# Altium PCB TinyFoc_v1.PcbDoc
Units mm, origin at the board's own origin, x right, y up, seen from the top; angles counter-clockwise.
Board outline 53.47 x 34.1 mm, 2 copper layers (Top Layer, Bottom Layer); 51 components, 44 nets, 226 pads, 38 vias.
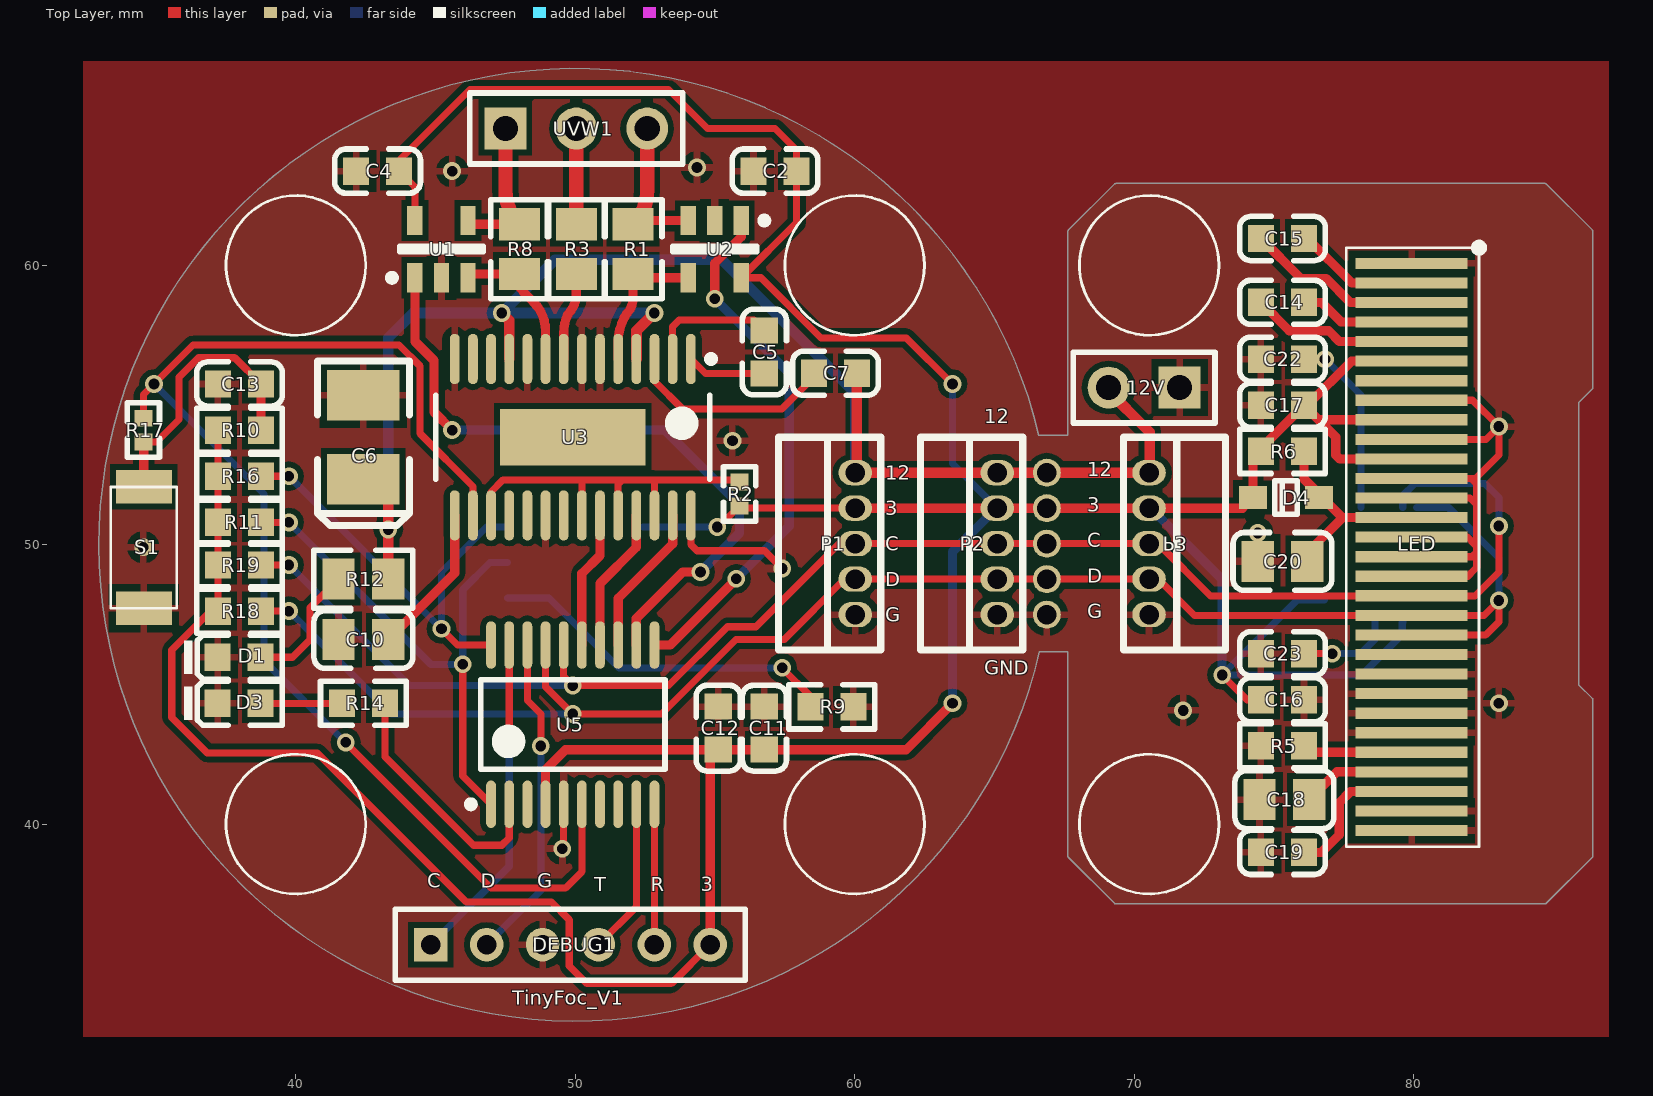
[diagram p0: Top Layer view]
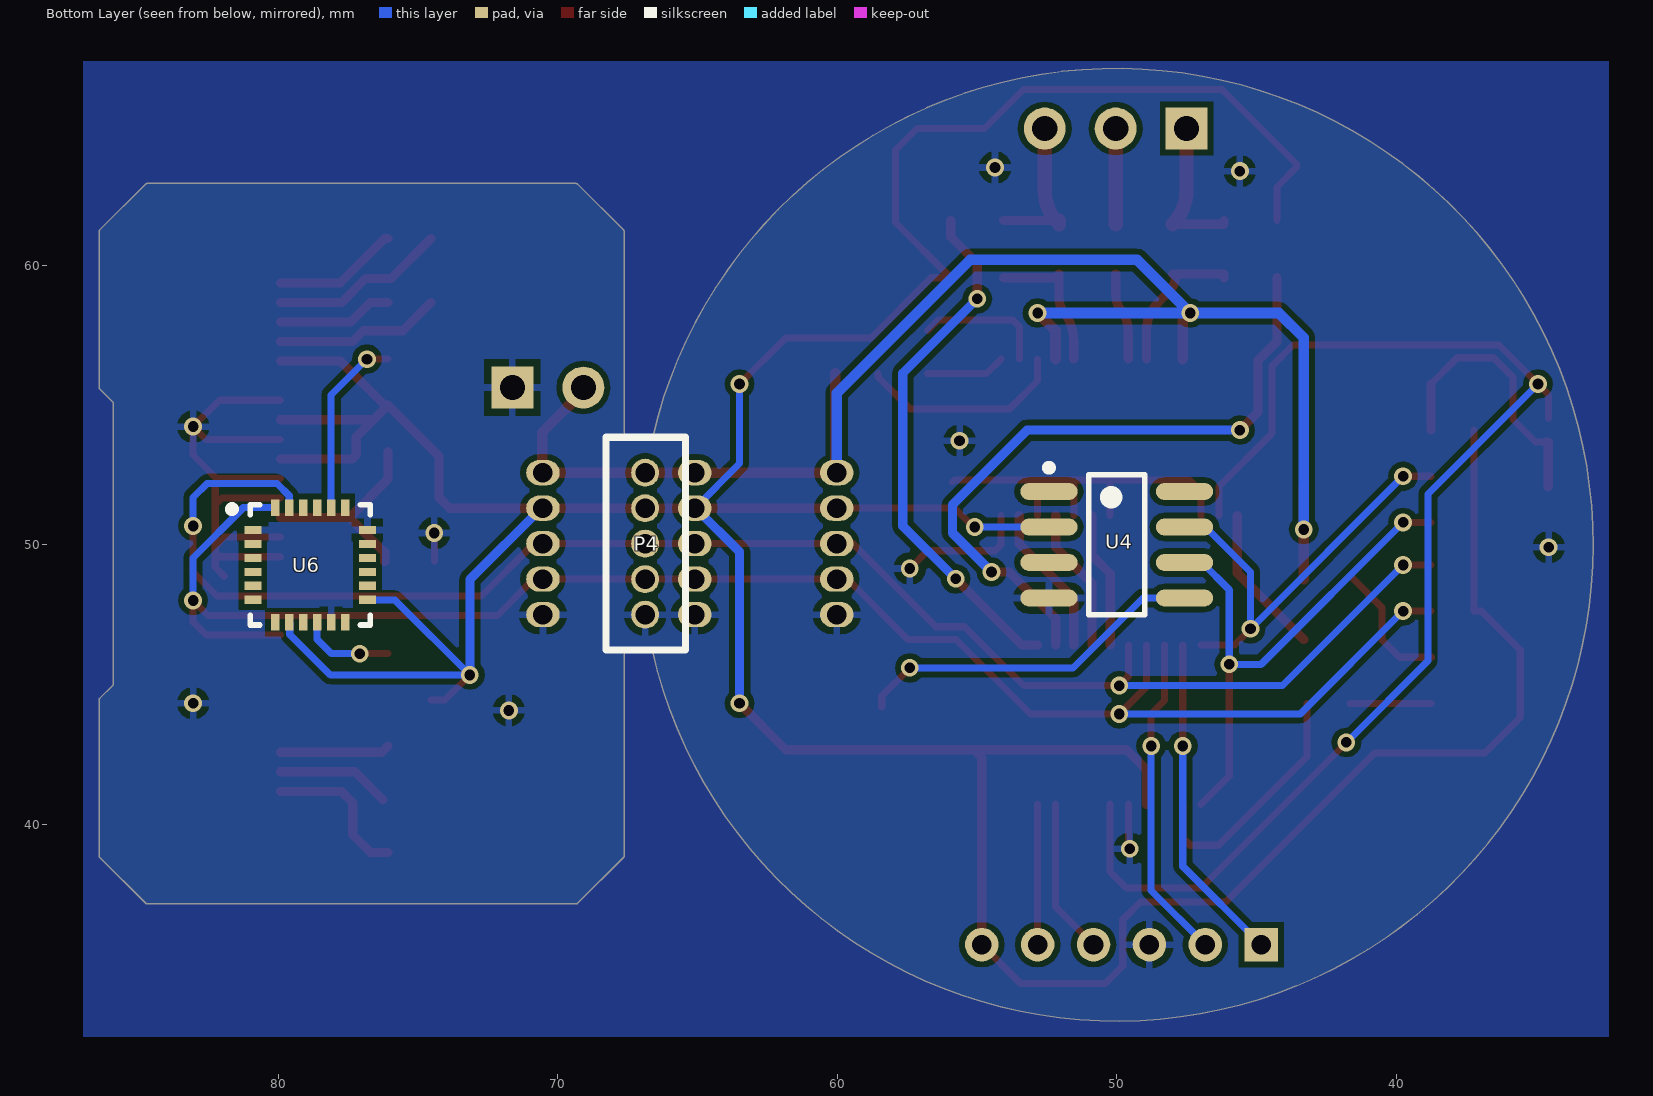
[diagram p1: Bottom Layer view, seen from below]
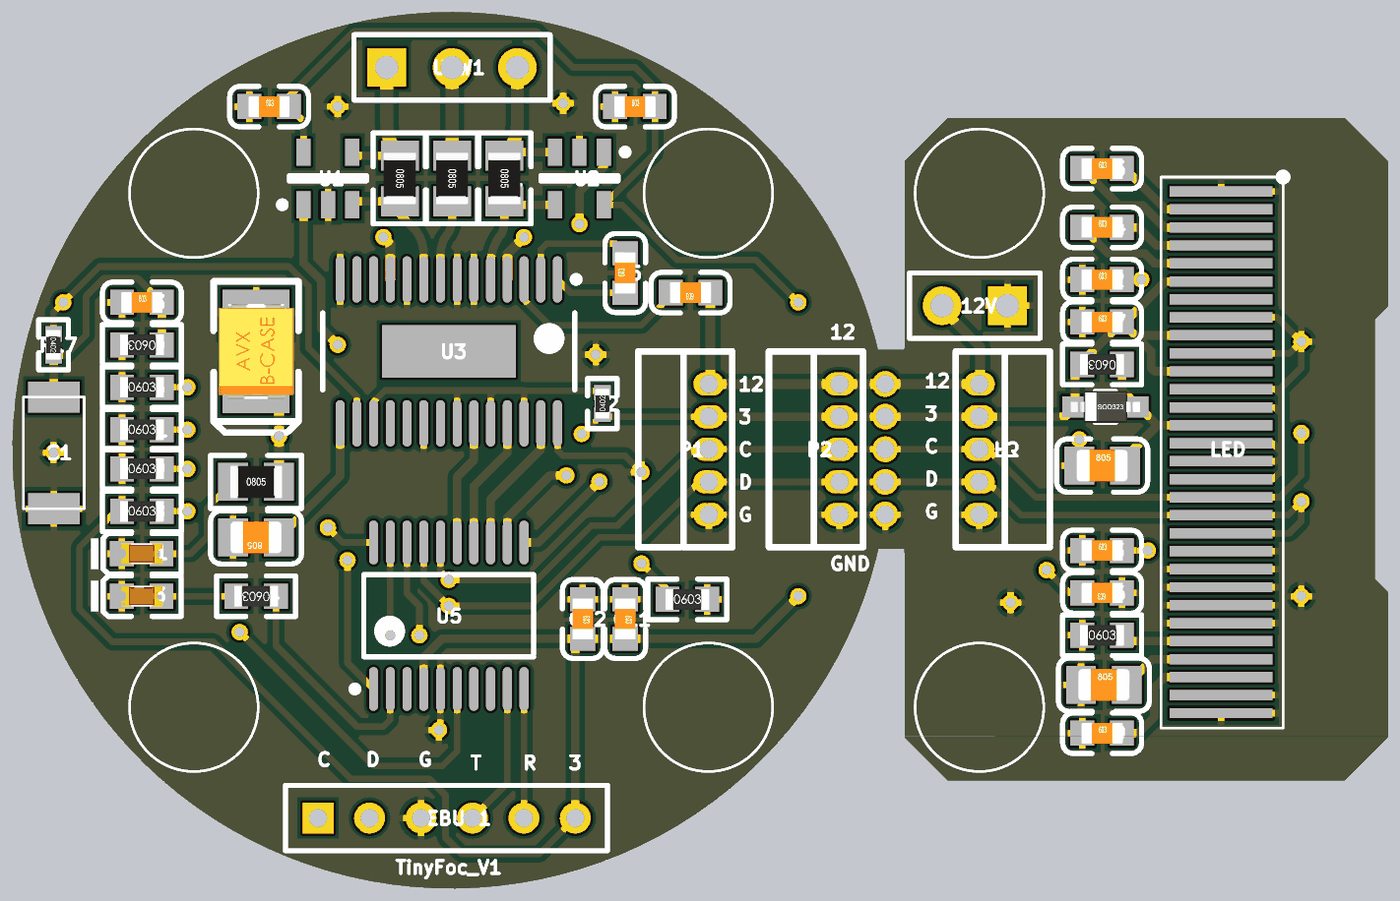
[diagram p2: 3D render of the assembled board from above, using the file's embedded part models]

## Layer stack, top to bottom
Top Layer: signal copper 0.0356
Dielectric: dielectric 0.32, FR-4, Dk 4.8
Bottom Layer: signal copper 0.0356

## Board outline
67.646,38.817 cw(c67.691,38.862) 67.627,38.862 67.627,46.164 66.613,46.164 cw(c50,50) 66.596,53.912 67.627,53.912 67.627,61.214 cw(c67.691,61.214) 67.646,61.259 69.297,62.91 cw(c69.342,62.865) 69.342,62.929 84.709,62.929 cw(c84.709,62.865) 84.754,62.91 86.405,61.259 cw(c86.36,61.214) 86.424,61.214 86.424,55.626 cw(c86.36,55.626) 86.405,55.581 85.916,55.092 85.916,44.984 86.405,44.495 cw(c86.36,44.45) 86.424,44.45 86.424,38.862 cw(c86.36,38.862) 86.405,38.817 84.754,37.166 cw(c84.709,37.211) 84.709,37.147 69.342,37.147 cw(c69.342,37.211) 69.297,37.166

## Design rules (kind name [scope] priority, off if disabled: settings)
Clearance [ispad vs ispad] p1: gap=0.051
Clearance Clearance_1 [All] p2: gap=0.203
PolygonConnect [All] p1: connectstyle=Relief reliefconductorwidth=0.254 reliefentries=4 polygonreliefangle="90 Angle" airgapwidth=0.254
RoutingVias [All] p1: holewidth=0.381 width=0.635 viastyle="Through Hole" minholewidth=0.33 minwidth=0.584 maxholewidth=0.711 maxwidth=1.27
SolderMaskExpansion [All] p1: expansion=0.102
Width [All] p1: maxlimit=0.762 minlimit=0.203 preferedwidth=0.254
28 further rules are at their usual default settings.

## Components (designator, comment, footprint, x,y, rotation, side; value= is the part's Value field where it differs from the comment)
12V "Header 2" HDR2X1_A 71.628,55.626 r180 top
C2 "100nF (104) 10% 50V" 0603_C 57.15,63.373 r0 top
C4 "100nF (104) 10% 50V" 0603_C 42.926,63.373 r0 top
C5 "10nF (103) 10% 50V" 0603_C 56.769,56.896 r90 top
C6 "10uF (106) ±10% 16V" CASE-B_3528 42.418,53.848 r270 top
C7 "100nF (104) 10% 50V" 0603_C 59.309,56.134 r180 top
C10 "470nF (474) 10% 50V" 0805_C 42.418,46.609 r180 top
C11 "100nF (104) 10% 50V" 0603_C 56.769,43.434 r270 top
C12 "100nF (104) 10% 50V" 0603_C 55.118,43.434 r270 top
C13 "100nF (104) 10% 50V" 0603_C 37.981,55.753 r0 top
C14 "1uF (105) 10% 50V" 0603_C 75.311,58.674 r0 top
C15 "1uF (105) 10% 50V" 0603_C 75.311,60.96 r0 top
C16 "100nF (104) 10% 50V" 0603_C 75.311,44.45 r180 top
C17 "1uF (105) 10% 50V" 0603_C 75.311,54.991 r0 top
C18 "4.7uF (475) 10% 25V" 0805_C 75.38,40.875 r0 top
C19 "2.2uF (225) 10% 16V" 0603_C 75.311,38.989 r0 top
C20 "10uF (106) 10% 16V" 0805_C 75.311,49.403 r0 top
C22 "100nF (104) 10% 50V" 0603_C 75.311,56.642 r0 top
C23 "100nF (104) 10% 50V" 0603_C 75.311,46.101 r0 top
D1 "红灯 0603" 0603_LED_S1 37.973,45.974 r0 top
D3 "蓝灯 0603" 0603_LED_S1 37.973,44.323 r0 top
D4 "1N4148WS T4" SOD-323 75.438,51.689 r0 top
DEBUG1 "Header 6" HDR6X1_A_2.0 44.831,35.687 r0 top
LED "OLED" OLED_pin30 81.915,60.071 r270 top
P1 "Header 5" HDR5_1.27_A#1 57.277,46.228 r90 top
P2 "Header 5" HDR5_1.27_A#1 62.357,46.228 r90 top
P3 "Header 5" HDR5_1.27_A#2 73.279,46.228 r90 top
P4 "Header 5" HDR5_1.27_B 68.707,46.228 r90 bottom
R1 "0.01Ω (0R0) ±1%" 0805_R 52.07,60.579 r270 top
R2 "0Ω (0R0) ±1%" 0402_R 55.88,51.816 r90 top
R3 "0Ω (0R0) ±1%" 0805_R 50.038,60.579 r270 top
R5 "1MΩ (1004) ±1%" 0603_R 75.311,42.799 r0 top
R6 "10KΩ (1002) ±1%" 0603_R 75.311,53.34 r180 top
R8 "0.01Ω (0R0) ±1%" 0805_R 48.006,60.579 r270 top
R9 "1KΩ (1001) ±1%" 0603_R 59.182,44.196 r0 top
R10 "1KΩ (1001) ±1%" 0603_R 37.981,54.102 r180 top
R11 "2KΩ (2001) ±1%" 0603_R 37.981,50.8 r0 top
R12 "2KΩ (2001) ±1%" 0805_R 42.418,48.768 r0 top
R14 "1KΩ (1001) ±1%" 0603_R 42.418,44.323 r180 top
R16 "2KΩ (2001) ±1%" 0603_R 37.981,52.451 r0 top
R17 "0Ω (0R0) ±1%" 0402_R 34.544,54.102 r270 top
R18 "2KΩ (2001) ±1%" 0603_R 37.981,47.625 r0 top
R19 "2KΩ (2001) ±1%" 0603_R 37.981,49.276 r0 top
S1 "SW-PB" SW_PB2_3*5 35.56,52.07 r270 top
U1 "INA180_A" SOT23 45.212,60.579 r90 top
U2 "INA180_A" SOT23 54.991,60.579 r270 top
U3 "DRV8313" TSSOP-28p 49.911,53.848 r270 top
U4 "AS5600" SOP-8N 50,50 r180 bottom
U5 "STM32G0" STM8S103 49.911,43.561 r90 top
U6 "mpu6050" QFN50P400X400X80_HS-25N 78.867,49.276 r180 bottom
UVW1 "Header 3" HDR3X1_A 47.498,64.897 r0 top

## Footprints (in the part's own frame and the unit in brackets; to place one, negate y for a bottom-side part, rotate by r counter-clockwise, add the part's x,y. Pads: shape width x height; smd on the part's side, far side on the other; paste and mask are expansions set on the pad)
0402_R [mm]
  rect 0.6x0.65 smd mask+0.051: 1(-0.425,0) 2(0.425,0)
  silkscreen extent -0.97,-0.58 0.97,0.58, body extent -0.57,-0.27 0.58,0.28, height 0.41
0603_C [mm]
  rect 0.93x0.98 smd: 1(-0.77,0) 2(0.77,0)
  silkscreen extent -1.53,-0.79 1.54,0.79, body extent -0.8,-0.4 0.8,0.4, height 0.3
0603_LED_S1 [mm]
  rect 0.93x0.98 smd: A(0.77,0) K(-0.77,0)
  silkscreen extent -1.97,-0.79 1.54,0.79, body extent -0.8,-0.4 0.8,0.4, height 0.6
0603_R [mm]
  rect 0.93x0.98 smd: 1(-0.77,0) 2(0.77,0)
  silkscreen extent -1.53,-0.79 1.54,0.79, body extent -0.85,-0.4 0.85,0.4, height 0.56
0805_C [mm]
  rect 1.16x1.47 smd: 1(-0.89,0) 2(0.89,0)
  silkscreen extent -1.77,-1.04 1.77,1.04, body extent -1,-0.62 1,0.63, height 0.77
0805_R [mm]
  rect 1.16x1.47 smd: 1(-0.89,0) 2(0.89,0)
  silkscreen extent -1.77,-1.04 1.77,1.03, body extent -1,-0.62 1,0.63, height 0.49
CASE-B_3528 [mm]
  rect 1.8x2.6 smd: 1(1.5,0) 2(-1.5,0)
  silkscreen extent -2.73,-1.65 3.16,1.65, body extent -1.85,-1.47 1.85,1.46, height 2.03
HDR2X1_A [mm] "Connector; Header; 2 Position"
  rect 1.5x1.5 hole 0.9: 1(0,0)
  round 1.5 hole 0.9: 2(2.54,0)
  silkscreen extent -1.27,-1.27 3.81,1.27
HDR3X1_A [mm] "Connector; Header; 3 Position"
  rect 1.5x1.5 hole 0.9: 1(0,0)
  round 1.5 hole 0.9: 2(2.54,0) 3(5.08,0)
  silkscreen extent -1.27,-1.27 6.35,1.27
HDR5_1.27_A#1 [mm]
  oval 0.9x1.2 hole 0.7: 1(1.27,-2.743) 2(2.54,-2.743) 3(3.81,-2.743) 4(5.08,-2.743) 5(6.35,-2.743)
  silkscreen extent 0,-3.66 7.62,0
HDR5_1.27_A#2 [mm]
  oval 0.9x1.2 hole 0.7: 1(1.27,2.743) 2(2.54,2.743) 3(3.81,2.743) 4(5.08,2.743) 5(6.35,2.743)
  silkscreen extent 0,0 7.62,3.66
HDR5_1.27_B [mm]
  round 1 hole 0.7: 1(1.27,-1.829) 2(2.54,-1.829) 3(3.81,-1.829) 4(5.08,-1.829) 5(6.35,-1.829)
  silkscreen extent 0,-3.28 7.62,-0.43
HDR6X1_A_2.0 [mm] "Connector; Header; 4 Position"
  rect 1.2x1.2 hole 0.7: 1(0,0)
  round 1.2 hole 0.7: 2(2,0) 3(4,0) 4(6,0) 5(8,0) 6(10,0)
  silkscreen extent -1.27,-1.27 11.25,1.27
OLED_pin30 [mm] "SSD1306_pin30"
  rect 0.4x4 smd: 1(0,-1.981) 2(0.7,-1.981) 3(1.4,-1.981) 4(2.1,-1.981) 5(2.8,-1.981) 6(3.5,-1.981) 7(4.2,-1.981) 8(4.9,-1.981) 9(5.6,-1.981) 10(6.3,-1.981) 11(7,-1.981) 12(7.7,-1.981) 13(8.4,-1.981) 14(9.1,-1.981) 15(9.8,-1.981) 16(10.5,-1.981) 17(11.2,-1.981) 18(11.9,-1.981) 19(12.6,-1.981) 20(13.3,-1.981) 21(14,-1.981) 22(14.7,-1.981) 23(15.4,-1.981) 24(16.1,-1.981) 25(16.8,-1.981) 26(17.5,-1.981) 27(18.2,-1.981) 28(18.9,-1.981) 29(19.6,-1.981) 30(20.3,-1.981)
  silkscreen extent -0.72,-4.32 20.88,0.59
QFN50P400X400X80_HS-25N [mm] "QFN, 24-Leads, Body 4.00x4.00mm, Pitch 0.50mm, Thermal Pad 2.65x2.65mm, IPC Medium Density"
  rect 0.6x0.3 smd: 1(-2.05,1.25) 2(-2.05,0.75) 3(-2.05,0.25) 4(-2.05,-0.25) 5(-2.05,-0.75) 6(-2.05,-1.25) 13(2.05,-1.25) 14(2.05,-0.75) 15(2.05,-0.25) 16(2.05,0.25) 17(2.05,0.75) 18(2.05,1.25)
  rect 0.3x0.6 smd: 7(-1.25,-2.05) 8(-0.75,-2.05) 9(-0.25,-2.05) 10(0.25,-2.05) 11(0.75,-2.05) 12(1.25,-2.05) 19(1.25,2.05) 20(0.75,2.05) 21(0.25,2.05) 22(-0.25,2.05) 23(-0.75,2.05) 24(-1.25,2.05)
  silkscreen extent -2.93,-2.15 2.15,2.15, body extent -2,-2 2,2, height 0.8
SOD-323 [mm]
  rect 1x0.83 smd: 1(1.18,0) 2(-1.18,0)
  silkscreen extent -0.4,-0.6 0.4,0.6, body extent -1.35,-0.62 1.35,0.63, height 1.1
SOP-8N [mm] "SOP, 8-Leads, Body 5.00x4.00mm, Pitch 1.27mm, IPC Medium Density"
  oval 2.05x0.6 smd: 1(-2.425,1.905) 2(-2.425,0.635) 3(-2.425,-0.635) 4(-2.425,-1.905) 5(2.425,-1.905) 6(2.425,-0.635) 7(2.425,0.635) 8(2.425,1.905)
  silkscreen extent -2.55,-2.5 1,2.88, body extent -2,-2.5 2,2.5, height 2.65
SOT23 [mm] "SOT23, 5-Leads, Body 2.90x2.45mm, Pitch 0.95mm, IPC Medium Density"
  rect 1.05x0.55 smd: 1(-1.025,0.95) 2(-1.025,0) 3(-1.025,-0.95) 4(1.025,-0.95) 5(1.025,0.95)
  silkscreen extent -1.15,-1.5 0.1,1.9, body extent -0.7,-1.5 0.7,1.5, height 1.1
STM8S103 [mm] "TSOP, 20-Leads, Body 6.50x4.40mm, Pitch 0.65mm, IPC Medium Density"
  oval 1.7x0.35 smd: 1(-2.85,2.925) 2(-2.85,2.275) 3(-2.85,1.625) 4(-2.85,0.975) 5(-2.85,0.325) 6(-2.85,-0.325) 7(-2.85,-0.975) 8(-2.85,-1.625) 9(-2.85,-2.275) 10(-2.85,-2.925) 11(2.85,-2.925) 12(2.85,-2.275) 13(2.85,-1.625) 14(2.85,-0.975) 15(2.85,-0.325) 16(2.85,0.325) 17(2.85,0.975) 18(2.85,1.625) 19(2.85,2.275) 20(2.85,2.925)
  silkscreen extent -2.97,-3.3 1.6,3.77, body extent -2.25,-3.3 2.25,3.3, height 1.2
SW_PB2_3*5 [mm] "2*4"
  rect 1.2x2 smd: 1(0,-1) 2(4.343,-1)
  silkscreen extent 0,-2.18 4.34,0.18, body extent 0,-2.18 4.34,0.18, height 1.4
TSSOP-28p [mm] "SOP, 28-Leads, Body 9.70x4.25mm, Pitch 0.65mm, Thermal Pad 5.20.2x3.10.2mm, IPC Medium Density"
  oval 1.8x0.35 smd: 1(-2.8,4.225) 2(-2.8,3.575) 3(-2.8,2.925) 4(-2.8,2.275) 5(-2.8,1.625) 6(-2.8,0.975) 7(-2.8,0.325) 8(-2.8,-0.325) 9(-2.8,-0.975) 10(-2.8,-1.625) 11(-2.8,-2.275) 12(-2.8,-2.925) 13(-2.8,-3.575) 14(-2.8,-4.225) 15(2.8,-4.225) 16(2.8,-3.575) 17(2.8,-2.925) 18(2.8,-2.275) 19(2.8,-1.625) 20(2.8,-0.975) 21(2.8,-0.325) 22(2.8,0.325) 23(2.8,0.975) 24(2.8,1.625) 25(2.8,2.275) 26(2.8,2.925) 27(2.8,3.575) 28(2.8,4.225)
  rect 2.032x5.2 smd: 29(0,0)
  silkscreen extent -2.92,-4.9 1.5,5.08, body extent -2.25,-4.9 2.25,4.9, height 2.65

## Part data
12V DEBUG1 UVW1: "接插件"
C2 C4 C7 C11 C12 C13 C16 C22 C23: library part "0603 100nF (104) 10% 50V", "贴片电容"
C5: library part "0603 10nF (103) 10% 50V", "贴片电容"
C6: library part "3528 100uF (107) 10% 6.3V", "钽电容"
C10: library part "0805 470nF (474) 10% 50V", "贴片电容"
C14 C15 C17: library part "0603 1uF (105) 10% 50V", "贴片电容"
C18: library part "0805 4.7uF (475) 10% 25V", "贴片电容"
C19: library part "0603 2.2uF (225) 10% 16V", "贴片电容"
C20: library part "0805 10uF (106) 10% 25V", "贴片电容"
D1: library part "0603 红灯", "发光二极管"
D3: library part "0603 蓝灯", "发光二极管"
D4: library part "SOD-323 1N4148WS T4", "二极管"
LED: "OLED显示屏12864"
P1 P2 P3 P4: "接插件-1.27"
R1 R3 R8: library part "0805 0Ω (0R0) 1%", "贴片电阻"
R2 R17: library part "0402 0Ω (0R0) 1%", "贴片电阻"
R5: library part "0603 1MΩ (1004) 1%", "贴片电阻"
R6: library part "0603 10KΩ (1002) 1%", "贴片电阻"
R9 R10 R14: library part "0603 1KΩ (1001) 1%", "贴片电阻"
R11 R16 R18 R19: library part "0603 2KΩ (2001) 1%", "贴片电阻"
R12: library part "0805 2KΩ (2001) 1%", "贴片电阻"
S1: "微动开关"
U1 U2: "电流检测"
U3: "无刷电机驱动芯片"
U4: "磁编码器"
U5: "STM32单片机20引脚"

## Via types
v1: diameter 0.635, hole 0.381, Top Layer to Bottom Layer, 38 vias

## Nets (pads, with @x,y where several pads share a name; then routed paths per layer and width w, separated by ;. In a path a pad name is that pad's centre, name@x,y a point inside that pad or via, vN(x,y) a via of type N, cw(c..) or ccw(c..) an arc to the next point about the centre after c; other vN are vias at no path point)
3V3: C2.2 C4.2 C11.2 C12.2 C16.2 C17.2 D4.2 DEBUG1.6 LED.6 LED.9 LED.11 P1.4 P2.4 P3.4 P4.4 R2.1 R6.2 R10.2 R11.1 R16.1 R18.1 R19.1 U1.5 U2.5 U4.2 U5.4 U6.8 U6.13 | length 167
  Top Layer w0.254: R10.2 R18.1 36.957,47.625 35.56,46.228 35.56,43.815 36.83,42.545 40.767,42.545 46.101,37.211 49.149,37.211 49.784,36.576 49.784,34.925 50.419,34.29 53.434,34.29 DEBUG1.6 ; C4.2 44.262,62.807 ; U1.5 44.262,62.807 ; v1(55.08,50.635) 55.124,50.635 R2.1 55.963,51.308 P1.4@59.639,51.308 ; v1@63.563,55.689 v1(63.5,55.753) 61.849,57.404 58.801,57.404 56.651,59.554 U2.5 57.92,61.533 C2.2 57.92,64.127 57.15,64.897 54.737,64.897 53.34,66.294 46.228,66.294 43.561,63.627 43.561,63.508 44.262,62.807 ; v1(73.152,45.339) 74.041,44.45 C16.2
  Top Layer w0.33: U5.4 48.936,41.951 49.649,42.664 C12.2 ; DEBUG1.6 54.831,42.377 C12.2 ; P1.4@59.639,51.308 P2.4 P4.4 70.561,51.308 73.877,51.308 D4.2 74.258,53.168 C17.2 ; v1(63.5,44.323) 61.841,42.664 C11.2 C12.2 ; LED.11 77.358,53.071 77.216,53.213 77.216,53.856 76.601,54.471 ; LED.9 76.601,54.471 ; LED.6 77.78,56.571 76.2,54.991 C17.2 ; C17.2 76.601,54.471
  Bottom Layer w0.254: U4.2 v1(55.08,50.635) ; v1(63.5,55.753) 63.5,52.908 P2.4 ; U6.13 75.839,48.026 v1(73.152,45.339) 78.147,45.339 79.597,46.789 79.597,47.206 U6.8
  Bottom Layer w0.33: v1(63.5,44.323) 63.5,49.745 65.063,51.308 P2.4 ; P3.4@70.561,51.308 70.598,51.308 73.152,48.754 v1(73.152,45.339)
12V: 12V.2 C6.1 C7.1 P1.5 P2.5 P3.5 P4.5 R12.2 U3.4 U3.11 | length 60.1
  Top Layer w0.381: R12.2 C6.1@43.308,52.07 ; v1(47.371,58.293) 47.636,58.028 U3.11 ; U3.4 52.192,56.654 52.192,57.653 v1(52.832,58.293) ; C7.1 60.079,52.637 P1.5 P2.5 P4.5 70.561,52.578 70.561,54.026 68.961,55.626 12V.2
  Bottom Layer w0.381: v1(43.307,50.546) 43.307,57.404 44.196,58.293 v1(47.371,58.293) ; v1(52.832,58.293) v1(47.371,58.293) ; P1.5@59.639,52.578 60.02,52.959 60.02,55.423 55.245,60.198 49.276,60.198 v1(47.371,58.293)
ADC1_IN4: U2.1 U5.11 | length 19
  Top Layer w0.33: U5.11 53.396,46.411 v1@55.759,48.774 ; v1(54.991,58.801) 54.991,60.071 55.941,61.021 U2.1
  Bottom Layer w0.33: v1(54.991,58.801) 57.658,56.134 57.658,50.673 v1(55.766,48.781)
ADC1_IN5: U1.1 U5.12 | length 24.3
  Top Layer w0.33: U1.1 44.262,57.276 44.945,56.593 44.945,54.75 v1(45.593,54.102) ; U5.12 52.186,47.36 53.848,49.022 v1(54.483,49.022)
  Bottom Layer w0.33: v1(45.593,54.102) 53.213,54.102 55.88,51.435 55.88,50.419 v1(54.483,49.022)
EN: C13.2 R10.1 R17.2 S1.1 | length 10.1
  Top Layer w0.254: R17.2 34.56,53.677 35.008,53.677 35.814,54.483 35.814,55.995 36.511,56.693 37.811,56.693 C13.2
  Top Layer w0.33: S1.1 34.56,53.677 R17.2@34.671,53.677 ; R10.1 C13.2
GND: 12V.1 C2.1 C4.1 C6.2 C10.2 C11.1 C12.1 C13.1 C16.1 C17.1 C18.1 C19.1 C20.1 C22.1 C23.1 D1.K D3.K DEBUG1.3 LED.1 LED.8 LED.10 LED.12 LED.13 LED.15 LED.16 LED.17 LED.21 LED.22 LED.23 LED.24 LED.25 LED.29 LED.30 P1.1 P2.1 P3.1 P4.1 R5.1 R9.2 S1.2 U1.2 U2.2 U3.6 U3.7 U3.10 U3.14 U3.20 U3.28 U4.4 U5.5 U6.1 U6.11 U6.18 | length 29.3
  Top Layer w0.254: v1(49.53,39.116) 49.586,39.172 U5.5 ; U3.28 54.136,50.004 54.356,49.784 56.769,49.784 v1(57.404,49.149) ; C20.1 C20.1 v1(74.422,50.419) ; LED.16 82.103,49.571 82.189,49.657 ; LED.15 81.936,50.271 82.189,50.018 ; LED.13 82.028,51.671 82.264,51.435 ; LED.12 82.061,52.371 ; LED.10 82.6,53.771 v1(83.058,54.229) ; LED.8 82.116,55.171 v1(83.058,54.229) ; 81.942,48.871 82.189,49.118 ; 82.264,49.193 82.264,51.435 ; 82.061,52.371 82.264,52.168 82.264,51.435 ; 82.061,52.371 82.216,52.371 83.058,53.213 v1(83.058,54.229)
  other v1: 71.755,44.069 83.058,44.323 34.544,49.911 55.626,53.721 45.593,63.373 54.356,63.5
I2C1_SCL: R16.2 U4.7 U5.20 | length 15.8
  Top Layer w0.254: R16.2 v1(39.751,52.451) ; v1(45.212,46.99) 45.791,46.411 U5.20
  Bottom Layer w0.254: v1(39.751,52.451) v1(45.212,46.99) 45.212,49.022 46.825,50.635 U4.7
I2C1_SDA: R11.2 U4.6 U5.1 | length 19.4
  Top Layer w0.254: R11.2 v1(39.751,50.8) ; v1(45.974,45.72) 45.974,41.723 U5.1
  Bottom Layer w0.254: v1(39.751,50.8) 44.831,45.72 v1(45.974,45.72) 45.974,48.387 46.952,49.365 U4.6
I2C2_SCL: LED.18 P1.3 P2.3 P3.3 P4.3 R19.2 U5.16 U6.23 | length 57.8
  Top Layer w0.254: R19.2 v1(39.751,49.276) ; U5.16 49.586,45.283 v1(49.911,44.958) 53.34,44.958 55.448,47.066 56.464,47.066 59.436,50.038 P2.3 P4.3 70.561,50.038 70.866,50.038 72.733,48.171 LED.18 82.207,48.171 83.058,49.022 v1(83.058,50.673)
  Bottom Layer w0.254: v1(39.751,49.276) 44.069,44.958 v1(49.911,44.958) ; U6.23 79.617,51.756 80.058,52.197 82.55,52.197 83.058,51.689 v1(83.058,50.673)
I2C2_SDA: LED.19 LED.20 P1.2 P2.2 P3.2 P4.2 R18.2 U5.17 U6.24 | length 60.8
  Top Layer w0.254: R18.2 v1(39.751,47.625) ; U5.17 48.936,44.917 v1(49.911,43.942) 53.086,43.942 55.753,46.609 57.48,46.609 59.639,48.768 P1.2 P2.2 P4.2 70.561,48.768 70.866,48.768 72.163,47.471 LED.19 82.523,47.471 v1(83.058,48.006) 83.058,47.244 82.585,46.771 LED.20
  Bottom Layer w0.254: v1(39.751,47.625) 43.434,43.942 v1(49.911,43.942) ; U6.24 81.262,51.326 83.058,49.53 v1(83.058,48.006)
NetC5_1: C5.1 U3.1 | length 2.8
  Top Layer w0.254: U3.1 54.658,56.126 C5.1
NetC5_2: C5.2 U3.2 | length 4.7
  Top Layer w0.254: U3.2 53.486,57.804 53.721,58.039 56.396,58.039 C5.2
NetC7_2: C7.2 U3.3 | length 7.5
  Top Layer w0.254: U3.3 52.836,55.859 53.831,54.864 57.404,54.864 58.539,55.999 C7.2
NetC10_1: C10.1 U3.15 | length 5.4
  Top Layer w0.33: C10.1 45.686,48.987 U3.15
NetC14_1: C14.1 LED.5 | length 6
  Top Layer w0.33: C14.1 75.557,57.658 76.962,57.658 77.349,57.271 LED.5
NetC14_2: C14.2 LED.4 | length 4.1
  Top Layer w0.33: C14.2 76.708,58.674 77.411,57.971 LED.4
NetC15_1: C15.1 LED.3 | length 6.3
  Top Layer w0.33: C15.1 75.969,59.532 76.873,59.532 77.735,58.671 LED.3
NetC15_2: C15.2 LED.2 | length 4.5
  Top Layer w0.33: C15.2 76.2,60.96 77.789,59.371 LED.2
NetC18_2: C18.2 LED.27 | length 4.1
  Top Layer w0.33: C18.2 77.266,41.871 LED.27
NetC19_2: C19.2 LED.28 | length 5.4
  Top Layer w0.33: C19.2 76.708,38.989 77.343,39.624 77.343,40.767 77.747,41.171 LED.28
NetC22_2: C22.2 U6.20 | length 6.6
  Top Layer w0.254: C22.2 v1(76.835,56.642)
  Bottom Layer w0.254: v1(76.835,56.642) 78.117,55.36 U6.20
NetC23_2: C23.2 U6.10 | length 3.4
  Top Layer w0.254: C23.2 v1(77.089,46.101)
  Bottom Layer w0.254: v1(77.089,46.101) 78.105,46.101 78.617,46.613 U6.10
NetD1_A: D1.A R12.1 | length 4.6
  Top Layer w0.254: D1.A 39.878,45.974 40.513,46.609 40.513,47.753 R12.1
NetD3_A: D3.A R14.2 | length 2.9
  Top Layer w0.254: D3.A R14.2
NetLED_26: LED.26 R5.2 | length 3.9
  Top Layer w0.33: R5.2 76.309,42.571 LED.26
NetR2_2: R2.2 U3.17 U3.22 U3.24 U3.26 | length 13.9
  Top Layer w0.254: U3.17 46.986,51.891 47.419,52.324 50.165,52.324 ; U3.22 50.236,52.253 50.165,52.324 ; U3.24 51.536,52.171 51.689,52.324 ; U3.26 52.836,52.32 ; R2.2 55.801,52.32 52.836,52.32 ; 50.165,52.324 51.689,52.324 ; 51.689,52.324 52.832,52.324 52.836,52.32
NetR9_1: R9.1 U4.5 | length 12.7
  Top Layer w0.254: v1(57.404,45.593) 58.412,44.585 R9.1
  Bottom Layer w0.254: U4.5 49.06,48.095 51.562,45.593 v1(57.404,45.593)
NRST: R17.1 U3.16 U5.6 | length 46.9
  Top Layer w0.254: R17.1 34.544,55.372 36.322,57.15 43.688,57.15 44.45,56.388 44.45,53.975 46.336,52.089 U3.16 ; v1(41.783,42.926) 46.99,37.719 49.657,37.719 50.236,38.298 U5.6
  Bottom Layer w0.254: v1(34.925,55.753) 38.862,51.816 38.862,45.847 v1(41.783,42.926)
OLED_NRST: C20.2 D4.1 LED.14 R6.1 | length 7.5
  Top Layer w0.33: R6.1 76.081,52.353 77.463,50.971 ; C20.2 C20.2@76.201,49.709 ; C20.2@76.201,49.746 C20.2@76.201,49.709 ; LED.14 77.463,50.971 ; C20.2@76.201,49.709 77.463,50.971
OUT_U: R1.2 U2.4 U3.5 | length 5.1
  Top Layer w0.33: U3.5 51.536,57.258 cw(c53.359,57.258) 51.757,58.129 cw(c53.359,57.258) 51.976,58.446 ccw(c51.003,58.883) 52.07,58.883 R1.2@52.07,59.554 ; R1.2 R1.2@52.07,59.554 ; U2.4 R1.2@52.07,59.554
OUT_V: R3.2 U3.8 | length 3.1
  Top Layer w0.33: U3.8 49.586,57.583 cw(c51.129,57.583) 49.739,58.253 ccw(c49.018,58.974) 49.965,58.596 ccw(c49.018,58.974) 50.038,58.974 R3.2
OUT_W: R8.2 U1.3 U3.9 | length 5.4
  Top Layer w0.33: U1.3 46.162,59.689 R8.2@47.879,59.689 ; R8.2 R8.2@47.879,59.689 ; U3.9 48.936,57.655 ccw(c47.495,57.655) 48.514,58.674 48.148,59.04 cw(c48.796,59.689) R8.2@47.879,59.689
PC14: R14.1 U5.2 | length 9
  Top Layer w0.254: R14.1 43.188,42.41 46.355,39.243 47.371,39.243 47.636,39.508 U5.2
PC15: U5.3
SWCLK: DEBUG1.1 U5.19 | length 12
  Top Layer w0.254: v1@47.625,42.672 47.636,42.683 U5.19
  Bottom Layer w0.254: DEBUG1.1 47.636,38.492 v1(47.636,42.799)
SWDIO: DEBUG1.2 U5.18 | length 11.7
  Top Layer w0.254: U5.18 48.286,44.424 48.768,43.942 v1(48.768,42.799)
  Bottom Layer w0.254: DEBUG1.2 48.768,37.624 v1(48.768,42.799)
TIM14_CH1: U3.23 U5.15 | length 4.9
  Top Layer w0.33: U5.15 50.236,48.966 50.886,49.616 U3.23
TIM16_CH1: U3.27 U5.13 | length 5.4
  Top Layer w0.33: U5.13 51.536,48.088 53.486,50.038 U3.27
TIM17_CH1: U3.25 U5.14 | length 5.2
  Top Layer w0.33: U5.14 50.886,48.611 52.186,49.911 U3.25
U: R1.1 U2.3 UVW1.3 | length 5.5
  Top Layer w0.33: R1.1@52.192,61.604 U2.3
  Top Layer w0.508: R1.1 52.07,61.604 52.192,61.604 ccw(c50.844,62.695) 52.578,62.695 UVW1.3
USART2_RX: DEBUG1.5 U5.10 | length 5
  Top Layer w0.254: DEBUG1.5 52.836,35.692 U5.10
USART2_TX: DEBUG1.4 U5.9 | length 5.6
  Top Layer w0.254: DEBUG1.4 52.186,37.042 U5.9
V: R3.1 UVW1.2 | length 3.4
  Top Layer w0.508: R3.1 UVW1.2
W: R8.1 U1.4 UVW1.1 | length 5.5
  Top Layer w0.33: U1.4 46.162,61.469 R8.1
  Top Layer w0.508: UVW1.1 47.498,62.695 ccw(c49.232,62.695) R8.1
pads on no net: LED.7 U3.12 U3.13 U3.18 U3.19 U3.21 U3.29 U4.1 U4.3 U4.8 U5.7 U5.8 U6.2 U6.3 U6.4 U6.5 U6.6 U6.7 U6.9 U6.12 U6.14 U6.15 U6.16 U6.17 U6.19 U6.21 U6.22

## Polygon pours and split planes (outlines as drawn)
GND on Bottom Layer "Top Layer-No Net" (solid, remove dead copper, pour order 2): 32.385,67.31 86.995,67.31 86.995,32.385 32.385,32.385
GND on Top Layer "Top Layer-No Net" (solid, remove dead copper, pour order 4): 32.385,67.31 86.995,67.31 86.995,32.385 32.385,32.385

## Silkscreen, mask and mechanical layers (free items; w line width, h text height)
Top Overlay:
  circle w0.1: c40,60 r2.5
  circle w0.1: c60,60 r2.5
  circle w0.1: c60,40 r2.5
  circle w0.1: c40,40 r2.5
  circle w0.1: c70.541,40 r2.5
  circle w0.1: c70.541,60 r2.5
  text "12" at 64.643,54.356 h0.51
  text "12" at 68.326,52.451 h0.51
  text "12" at 61.087,52.324 h0.51
  text "3" at 68.326,51.181 h0.51
  text "3" at 61.087,51.054 h0.51
  text "C" at 68.326,49.911 h0.51
  text "C" at 61.087,49.784 h0.51
  text "D" at 68.326,48.641 h0.51
  text "D" at 61.087,48.514 h0.51
  text "G" at 68.326,47.371 h0.51
  text "G" at 61.087,47.244 h0.51
  text "GND" at 64.643,45.339 h0.51
  text "C" at 44.704,37.719 h0.51
  text "D" at 46.609,37.719 h0.51
  text "G" at 48.641,37.719 h0.51
  text "T" at 50.673,37.592 h0.51
  text "R" at 52.705,37.592 h0.51
  text "3" at 54.483,37.592 h0.51
  text "TinyFoc_V1" at 47.752,33.528 h0.51
Mechanical 1:
  circle w0.1: c40,60 r1.3
  circle w0.1: c40,40 r1.3
  circle w0.1: c60,60 r1.3
  circle w0.1: c60,40 r1.3
  circle w0.1: c70.541,40 r1.3
  circle w0.1: c70.541,60 r1.3
  lines w0.1: 66.565,46.177 cw(c50,50) 66.565,53.823
  lines w0.127: 66.548,46.228 67.691,46.228 67.691,38.862 69.342,37.211 84.709,37.211 86.36,38.862 86.36,44.45 85.852,44.958 85.852,55.118 86.36,55.626 86.36,61.214 84.709,62.865 69.342,62.865 67.691,61.214 67.691,53.848 66.548,53.848